# EAGLE board Schematic (EAGLE 9.5.1)
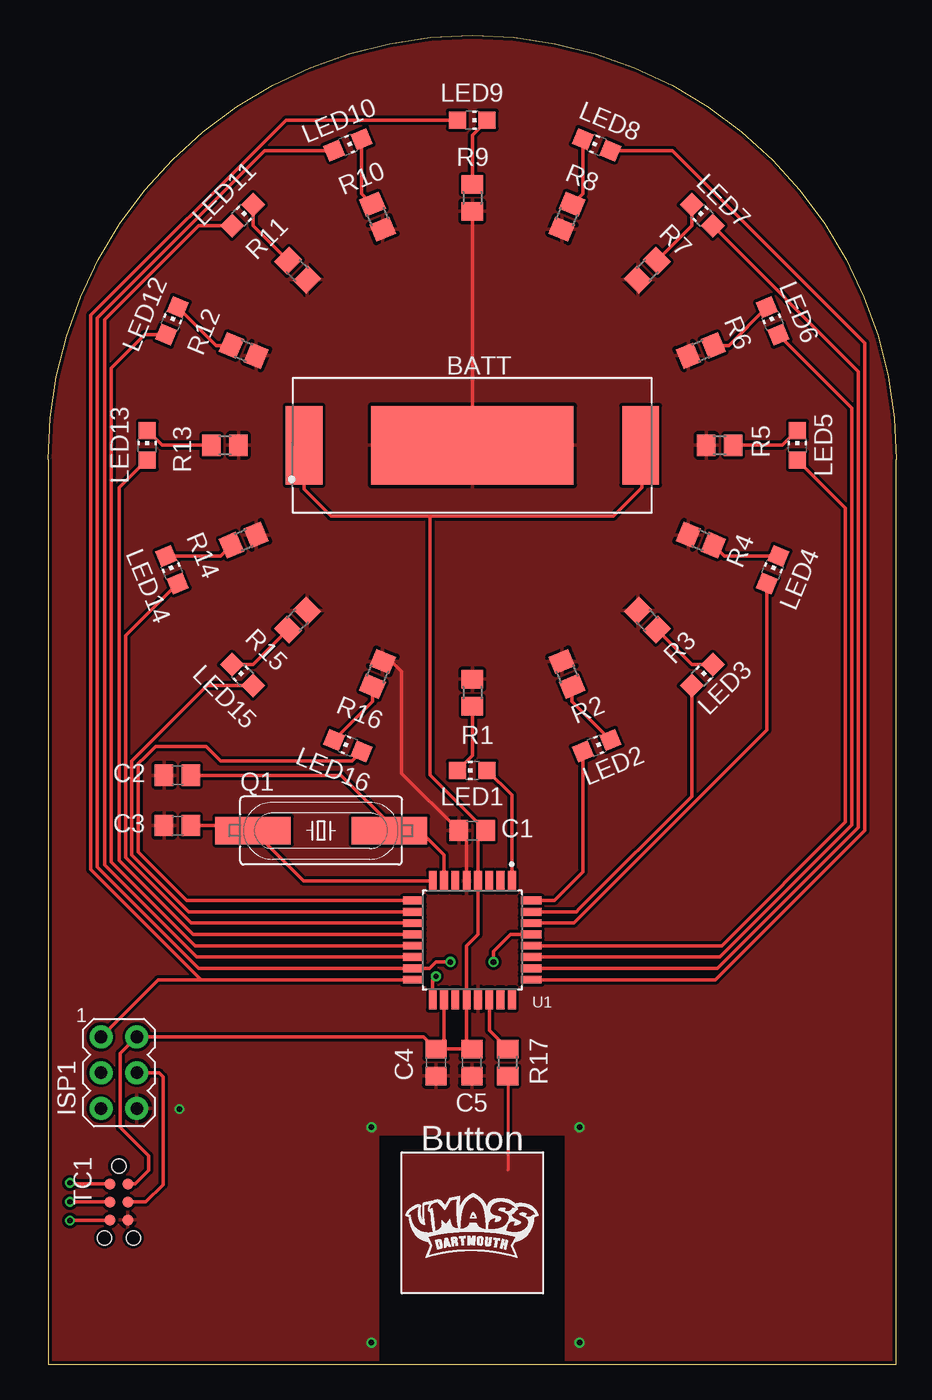
[diagram p0: board, top side]
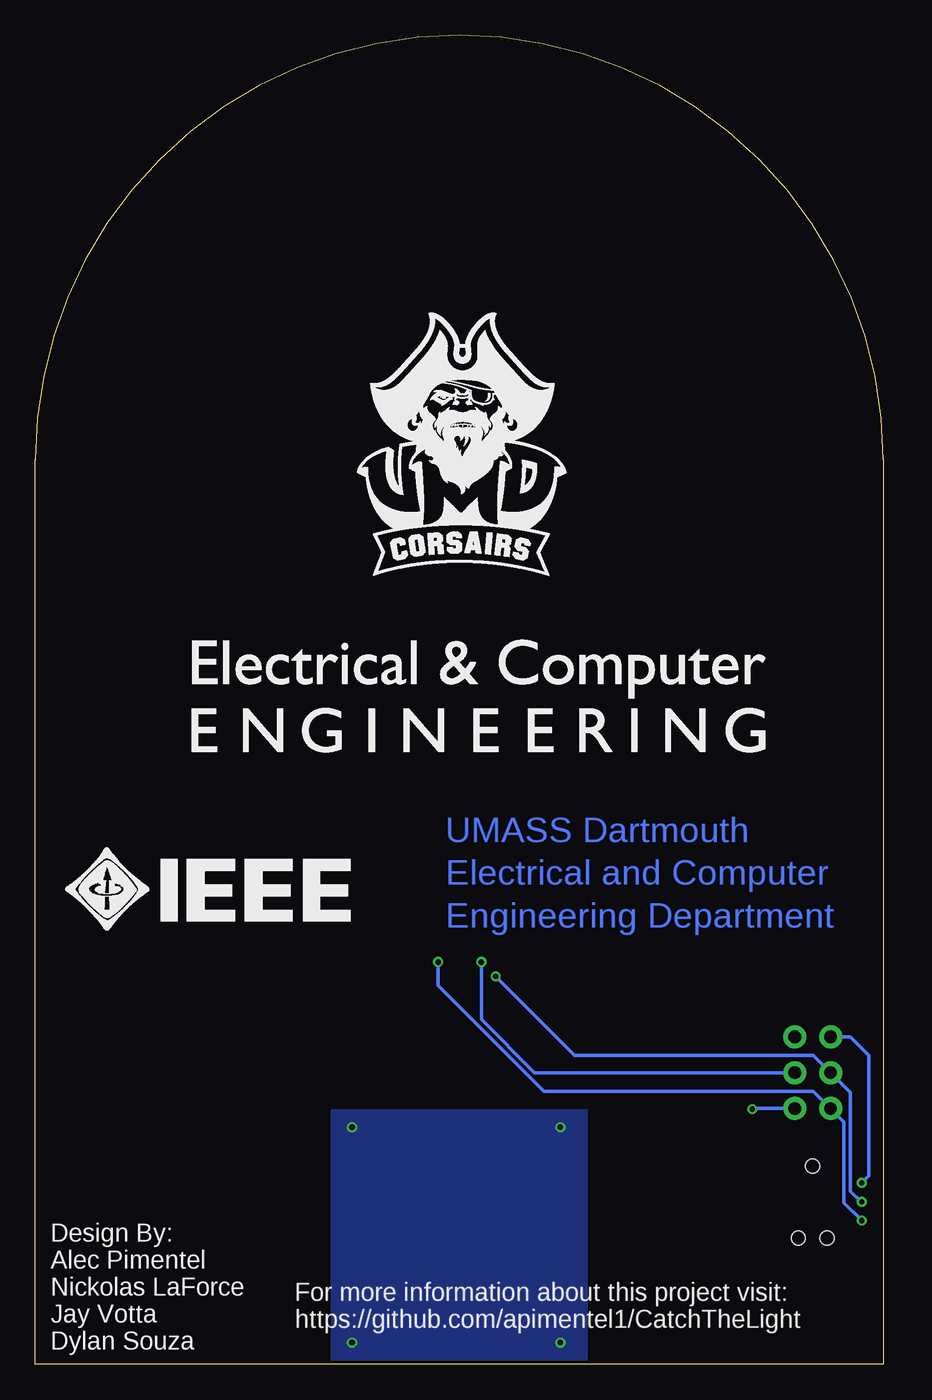
[diagram p1: board, bottom side, seen from below]

Size 60 x 94 mm. Coordinates in mm from the lower left corner, seen from the top.
Outline: 0,64 0,0 60,0 60,64 arc180 0,64
Copper layers (1*16): Top 0.035mm / dielectric 1.5mm / Bottom 0.035mm
Design rules "Dirty8TS": minimum track width 8mil, minimum drill 15mil, track to track 8mil, track to pad 8mil, pad to pad 8mil, via to via 8mil, smd to smd 0mil, copper to edge 10mil, drill to drill 10mil, minimum pad ring 10mil, minimum via ring 6mil, stop-mask expansion 2mil, vias tented up to drill 25mil, thermal gap 10mil
Net classes: 0 default: clearance 0.205 mm

## Footprints (pad centres in the part's own frame; a part is rotated, then mirrored left to right if it is on the bottom)
BC-2003 = smd 2.6 x 5.56: 1 0,0; 2 23.81,0 | smd 14.32 x 5.56: 3 11.905,0
C0805 = smd 1.3 x 1.5: 1 -0.95,0; 2 0.95,0
AVRISP = drill 0.9 pad 1.626: 1 -1.27,2.54; 2 1.27,2.54; 3 -1.27,0; 4 1.27,0; 5 -1.27,-2.54; 6 1.27,-2.54
CHIP-LED0805 = smd 1.2 x 1.2: A 0,-1.05; C 0,1.05
HC49UP = smd 5.334 x 1.93: 1 -4.826,0; 2 4.826,0
R0805 = smd 1.3 x 1.5: 1 -0.95,0; 2 0.95,0
TC2030-IDC-NL = smd 0.787 x 0.787: 1 -1.27,-0.635; 2 -1.27,0.635; 3 0,-0.635; 4 0,0.635; 5 1.27,-0.635; 6 1.27,0.635 | hole 0.991: -2.54,0; 2.54,1.016; 2.54,-1.016
QFP80P900X900X120-32N = smd 1.47 x 0.55: 1 -4.17,2.8; 2 -4.17,2; 3 -4.17,1.2; 4 -4.17,0.4; 5 -4.17,-0.4; 6 -4.17,-1.2; 7 -4.17,-2; 8 -4.17,-2.8; 17 4.17,-2.8; 18 4.17,-2; 19 4.17,-1.2; 20 4.17,-0.4; 21 4.17,0.4; 22 4.17,1.2; 23 4.17,2; 24 4.17,2.8 | smd 0.55 x 1.47: 9 -2.8,-4.17; 10 -2,-4.17; 11 -1.2,-4.17; 12 -0.4,-4.17; 13 0.4,-4.17; 14 1.2,-4.17; 15 2,-4.17; 16 2.8,-4.17; 25 2.8,4.17; 26 2,4.17; 27 1.2,4.17; 28 0.4,4.17; 29 -0.4,4.17; 30 -1.2,4.17; 31 -2,4.17; 32 -2.8,4.17

## Placement (x,y rotation side)
BATT  [BC-2003]  18.09,65 0 top
C1  [C0805]  30,37.75 180 top
C2  [C0805]  9.14,41.66 180 top
C3  [C0805]  9.14,38.1 180 top
C4  [C0805]  27.43,21.34 270 top
C5  [C0805]  29.97,21.34 270 top
ISP1  AVRISP-6  [AVRISP]  5,20.62 0 top
LED1  [CHIP-LED0805]  30,42 90 top
LED2  [CHIP-LED0805]  38.8,43.75 292.5 top
LED3  [CHIP-LED0805]  46.26,48.74 315 top
LED4  [CHIP-LED0805]  51.25,56.2 337.5 top
LED5  [CHIP-LED0805]  53,65 0 top
LED6  [CHIP-LED0805]  51.25,73.8 22.5 top
LED7  [CHIP-LED0805]  46.26,81.26 45 top
LED8  [CHIP-LED0805]  38.8,86.25 67.5 top
LED9  [CHIP-LED0805]  30,88 270 top
LED10  [CHIP-LED0805]  21.2,86.25 292.5 top
LED11  [CHIP-LED0805]  13.74,81.26 315 top
LED12  [CHIP-LED0805]  8.75,73.8 337.5 top
LED13  [CHIP-LED0805]  7,65 0 top
LED14  [CHIP-LED0805]  8.75,56.2 22.5 top
LED15  [CHIP-LED0805]  13.74,48.74 45 top
LED16  [CHIP-LED0805]  21.2,43.75 67.5 top
Q1  [HC49UP]  19.3,37.75 0 top
R1  [R0805]  30,47.5 270 top
R2  [R0805]  36.7,48.83 292.5 top
R3  [R0805]  42.37,52.63 315 top
R4  [R0805]  46.17,58.3 337.5 top
R5  [R0805]  47.5,65 0 top
R6  [R0805]  46.17,71.7 22.5 top
R7  [R0805]  42.37,77.37 45 top
R8  [R0805]  36.7,81.17 67.5 top
R9  [R0805]  30,82.5 270 top
R10  [R0805]  23.3,81.17 292.5 top
R11  [R0805]  17.63,77.37 315 top
R12  [R0805]  13.83,71.7 337.5 top
R13  [R0805]  12.5,65 0 top
R14  [R0805]  13.83,58.3 22.5 top
R15  [R0805]  17.63,52.63 45 top
R16  [R0805]  23.3,48.83 67.5 top
R17  [R0805]  32.51,21.34 90 top
TC1  TC2030-IDC-NL  [TC2030-IDC-NL]  5,11.47 270 top
U1  ATMEGA328PB-AUR  [QFP80P900X900X120-32N]  30,30 270 top

## Library data of the parts
BATT = My-library_
C1-C5 = rcl; SPICEPREFIX: C
ISP1 = adafruit
LED1-LED16 = led
Q1 = crystal; OC_FARNELL: unknown; OC_NEWARK: unknown
R1-R17 = rcl; SPICEPREFIX: R
TC1 = TagConnect
U1 = ATMEGA328PB-AUR; DESCRIPTION: AVR microcontroller; EEPROM: 1024B; SRAM: 2kB; Flash: 32kB; TQFP32; DIGI-KEY_PART_NUMBER: ATMEGA328PB-AURCT-ND; DIGI-KEY_PURCHASE_URL: https://www.digikey.com/product-detail/en/microchip-technology/ATMEGA328PB-AUR/ATMEGA328PB-AURCT-ND/5722706?utm_source=snapeda&utm_medium=aggregator&utm_campaign=symbol; MF: Microchip; MP: ATMEGA328PB-AUR; PACKAGE: TQFP-32 Microchip

## Nets
+3V3: BATT.1 BATT.2 C1.1 C4.1 C5.1 ISP1.2 TC1.2 U1.4 U1.18 U1.20
GND: BATT.3 C1.2 C2.2 C3.2 C4.2 C5.2 ISP1.6 R1.1 R2.1 R3.1 R4.1 R5.1 R6.1 R7.1 R8.1 R9.2 R10.2 R11.2 R12.2 R13.2 R14.2 R15.2 R16.2 TC1.6 U1.5 U1.21
N$1: LED5.C R5.2
N$2: LED13.A U1.12
N$3: LED12.A U1.13
N$4: LED11.A U1.14
N$5: LED6.A U1.27
N$6: LED5.A U1.28
N$7: LED8.A U1.25
N$8: LED7.A U1.26
N$9: LED4.A U1.30
N$10: LED3.A U1.31
N$11: LED2.A U1.32
N$12: LED1.A U1.1
N$13: LED16.A U1.9
N$14: LED15.A U1.10
N$15: LED14.A U1.11
N$16: ISP1.4 LED10.A TC1.4 U1.15
N$32: LED9.C R9.1
N$33: R17.2 U1.22
N$34: LED8.C R8.2
N$35: LED7.C R7.2
N$36: LED6.C R6.2
N$38: LED4.C R4.2
N$39: LED3.C R3.2
N$40: LED2.C R2.2
N$41: LED1.C R1.2
N$42: LED10.C R10.1
N$43: LED11.C R11.1
N$44: LED12.C R12.1
N$45: LED13.C R13.1
N$46: LED14.C R14.1
N$47: LED15.C R15.1
N$48: LED16.C R16.1
PB3: ISP1.3 TC1.3 U1.17
PB4: ISP1.1 LED9.A TC1.1 U1.16
RESET: ISP1.5 TC1.5 U1.29
SIG: R17.1
XTAL1: C2.1 Q1.2 U1.7
XTAL2: C3.1 Q1.1 U1.8

## Tracks (layer width: path | path; a pad name or v marks a point on that pad's centre or on a via)
+3V3
  Top 0.254: BATT.1 18.09,61.91 20,60 27,60 | BATT.2 42,64.91 42,62 40,60 27,60 | 27,60 27,41.7 C1.1 30.4,37.2 U1.4 30.4,30.4 29.6,29.6 U1.20 29.6,22.29 C5.1 C4.1 | C4.1 28,22.85 U1.18 | C4.1 26.56,23.16 ISP1.2 5.08,21.97 5.08,16.76 7.11,14.73 7.11,13.72 6.14,12.74 TC1.2
GND  (via drill 0.38, 0.4)
  Top 0.254: R16.2 24.29,49.71 25,49 25,41.8 C1.2 29.6,37.2 U1.5 | R9.2 BATT.3
  Bottom 0.254: ISP1.6 9.23,18.08 v9.27,18.03
  other vias: 22.86,16.76 22.86,1.52 37.59,1.52 37.59,16.76
  pour Bottom: 21,18 21,0 39,0 39,18
  pour Top: -2.54,-2.03 22.35,-2.03 23.37,-2.03 23.37,13.72 23.37,16.26 24.89,16.26 36.58,16.26 36.58,1.52 36.58,-1.02 55.88,-1.02 64.01,-1.02 64.01,91.95 64.01,96.52 -3.56,96.52 -3.56,-2.03
N$1
  Top 0.254: R5.2 51.95,65 LED5.C
N$2
  Top 0.254: U1.12 10.25,30.4 5,35.65 5,62 6.95,63.95 LED13.A
N$3
  Top 0.254: U1.13 10.4,29.6 4.46,35.54 4.46,70.46 6.83,72.83 LED12.A
N$4
  Top 0.254: U1.14 10.5,28.8 4,35.3 4,73.89 10.63,80.52 LED11.A
N$5
  Top 0.254: U1.27 47.5,28.8 56.85,38.15 56.85,67.63 LED6.A
N$6
  Top 0.254: U1.28 47.65,29.6 56.39,38.34 56.39,60.56 LED5.A
N$7
  Top 0.254: U1.25 47.2,27.2 57.77,37.77 57.77,72.23 44.15,85.85 LED8.A
N$8
  Top 0.254: U1.26 47.35,28 57.31,37.96 57.31,70.22 LED7.A
N$9
  Top 0.254: U1.30 37.2,31.2 50.85,44.85 LED4.A
N$10
  Top 0.254: LED3.A 45.52,40.17 37.73,32.38 37.54,32.19 37.35,32 U1.31
N$11
  Top 0.254: U1.32 35.8,32.8 37.83,34.83 LED2.A
N$12
  Top 0.254: LED1.A 32.8,40.25 U1.1
N$13
  Top 0.254: U1.9 9.8,32.8 6.38,36.22 6.38,42.48 6.84,42.94 7.35,43.45 7.58,43.69 11.18,43.69 12.19,42.67 21.49,42.67 LED16.A
N$14
  Top 0.254: U1.10 17.27,32 17,32 9.95,32 5.92,36.03 5.92,42.67 11.24,47.99 LED15.A
N$15
  Top 0.254: U1.11 10.1,31.2 5.46,35.84 5.46,51.53 LED14.A
N$16  (via drill 0.4)
  Top 0.254: LED10.A 15.31,85.85 3.46,74 3.46,35.19 10.65,28 U1.15 26.98,28 27.43,28.45 v28.45,28.45 | ISP1.4 7.83,20.62 8.13,20.32 8.13,12.7 6.9,11.47 TC1.4
  Bottom 0.254: v28.45,28.45 28.45,24.38 24.68,20.62 ISP1.4
N$32
  Top 0.254: R9.1 30,86.95 LED9.C
N$33
  Top 0.254: R17.2 31.2,23.6 U1.22
N$34
  Top 0.254: R8.2 37.83,82.82 LED8.C
N$35
  Top 0.254: R7.2 45.52,80.52 LED7.C
N$36
  Top 0.254: R6.2 48.14,72.06 LED6.C
N$38
  Top 0.254: R4.2 47.82,57.17 LED4.C
N$39
  Top 0.254: R3.2 45.52,49.48 LED3.C
N$40
  Top 0.254: R2.2 37.06,46.86 LED2.C
N$41
  Top 0.254: R1.2 30,43.05 LED1.C
N$42
  Top 0.254: R10.1 22.17,82.82 LED10.C
N$43
  Top 0.254: R11.1 16,79 | 16,79 | 16,79 14.48,80.52 LED11.C
N$44
  Top 0.254: R12.1 11.86,72.06 LED12.C
N$45
  Top 0.254: R13.1 8.05,65 LED13.C
N$46
  Top 0.254: R14.1 12.18,57.17 LED14.C
N$47
  Top 0.254: R15.1 14.48,49.48 LED15.C
N$48
  Top 0.254: R16.1 22.94,46.86 LED16.C
PB3  (via drill 0.38)
  Top 0.254: U1.17 27.2,27.2 v27.43,27.43 | TC1.3 v1.53,11.47 v1.52,11.48
  Bottom 0.254: v27.43,27.43 21.84,21.84 4.96,21.84 ISP1.3 2.33,19.21 2.33,12.23 1.57,11.48 v1.52,11.48
PB4  (via drill 0.38)
  Top 0.254: LED9.A 16.81,88 3,74.19 3,35 10.8,27.2 U1.16 7.77,27.2 ISP1.1 | v1.52,12.83 1.59,12.76 1.61,12.74 TC1.1
  Bottom 0.254: ISP1.1 2.33,23.16 1.02,21.84 1.02,13.34 v1.52,12.83
RESET  (via drill 0.38, 0.4)
  Top 0.254: U1.29 32.69,30.4 31.5,29.21 v31.5,28.45 | TC1.5 4.32,10.16 v1.52,10.16
  Bottom 0.254: v31.5,28.45 31.5,26.78 24.02,19.3 4.96,19.3 ISP1.5 2.79,17.13 2.79,11.42 v1.52,10.16
SIG
  Top 0.203: R17.1 32.51,13.72
  pour Top: 25,5 25,15 35,15 35,5
XTAL1
  Top 0.254: U1.7 28,36.01 26.01,38 24.38,38 | Q1.2 24.64,37.75 24.38,38 | C2.1 20.73,41.66 24.38,38
XTAL2
  Top 0.254: U1.8 18.05,34.17 Q1.1 14.12,38.1 C3.1

## Text on the board
Bottom: UMASS Dartmouth / Electrical and Computer / Engineering Department
bPlace: For more information about this project visit: / https://github.com/apimentel1/CatchTheLight | Design By: / Alec Pimentel / Nickolas LaForce / Jay Votta / Dylan Souza
tNames: Button